# Altium PCB Embarcado.PcbDoc (part 2 of 2)
Units mm, origin at the board's own origin, x right, y up, seen from the top; angles counter-clockwise.
Board outline 64.52 x 71.25 mm, 2 copper layers (Top Layer, Bottom Layer); 37 components, 40 nets, 204 pads, 24 vias.
Unrouted connection lines stored in the file: 4.
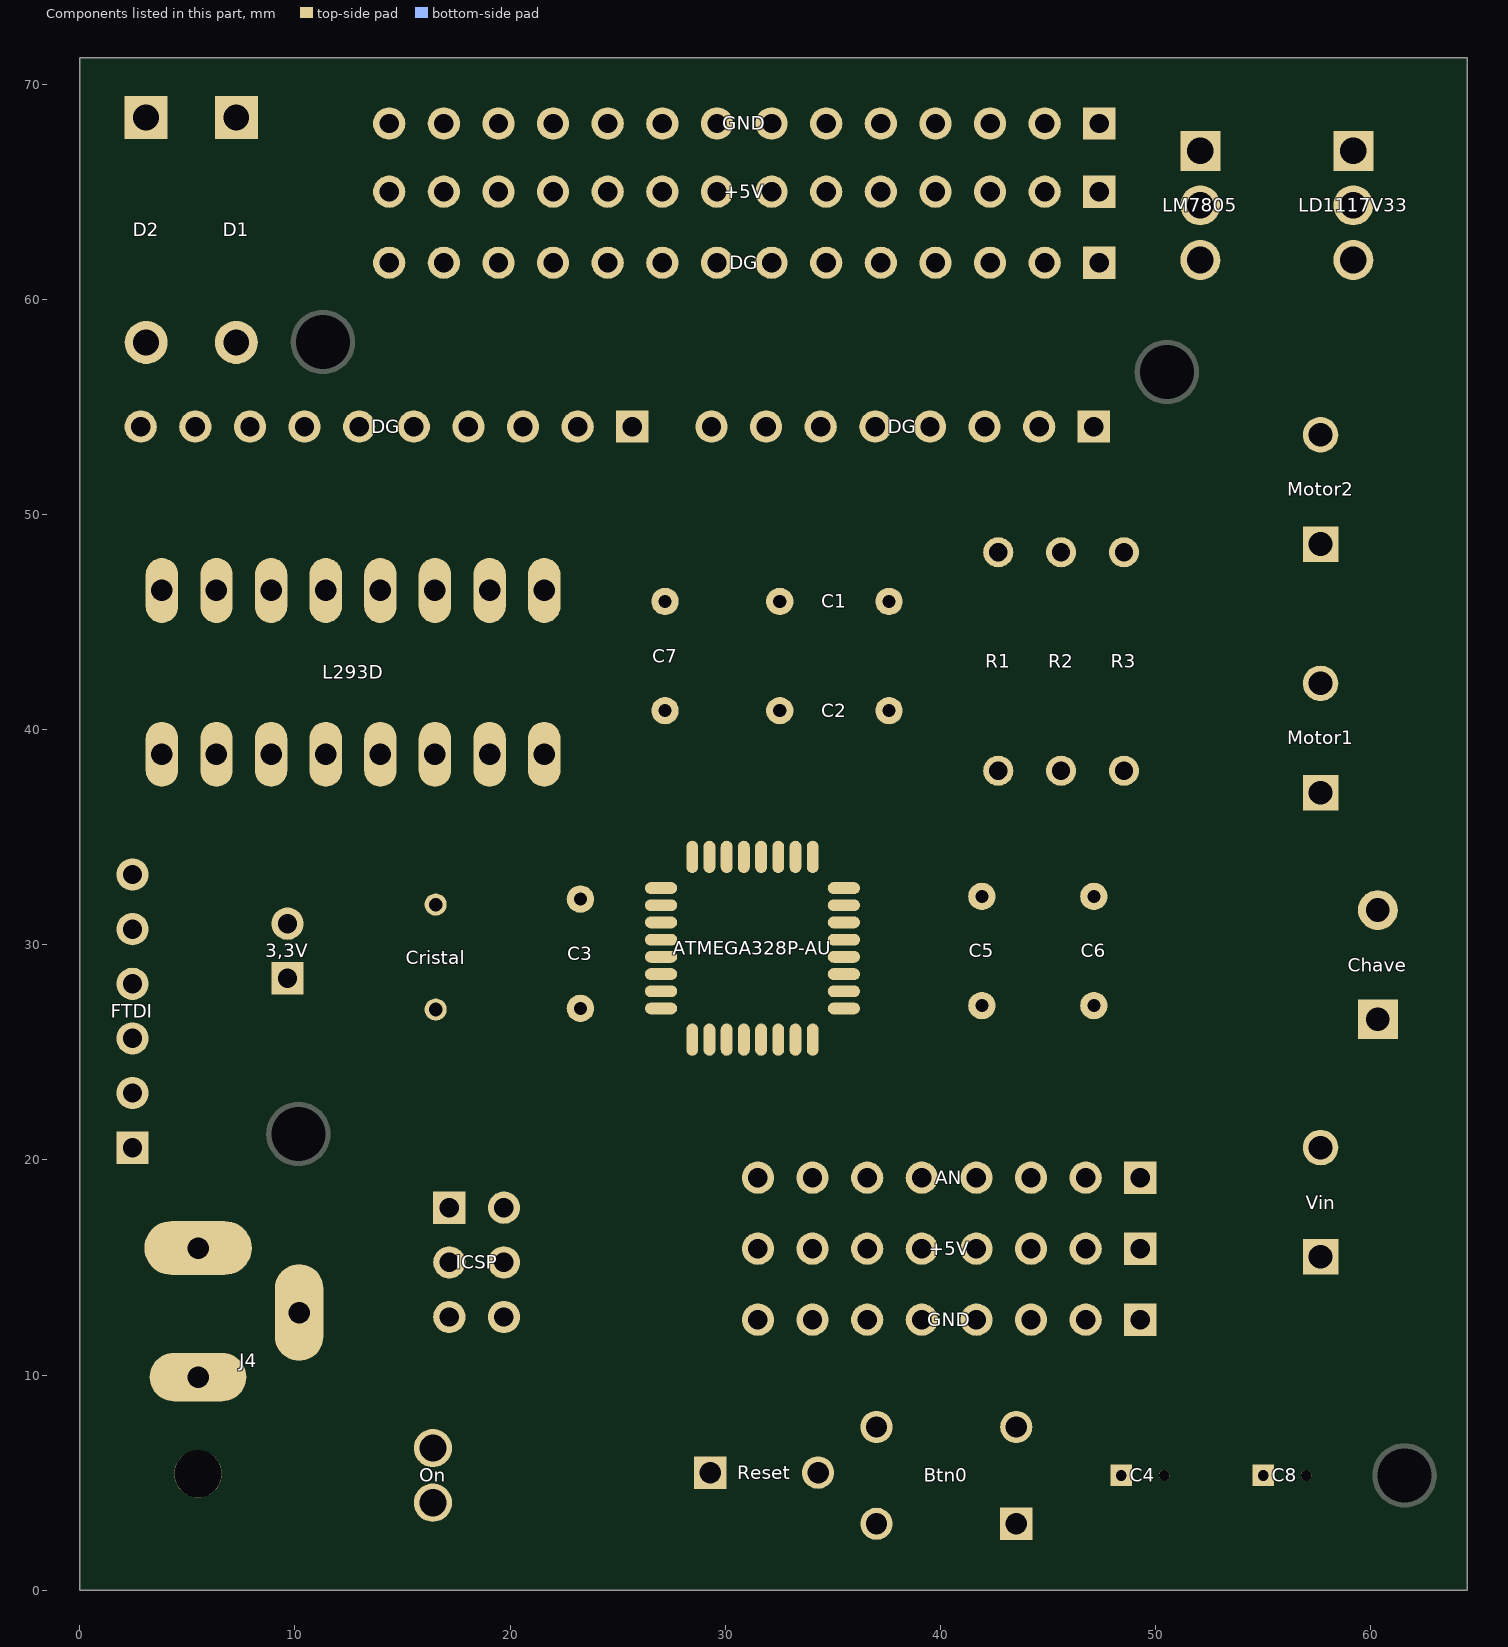
[diagram p2: the components of this part, seen from the top]

## Via types
v1: diameter 1.27, hole 0.711, Top Layer to Bottom Layer, 24 vias

## Nets (pads, with @x,y where several pads share a name; then routed paths per layer and width w, separated by ;. In a path a pad name is that pad's centre, name@x,y a point inside that pad or via, vN(x,y) a via of type N, cw(c..) or ccw(c..) an arc to the next point about the centre after c; other vN are vias at no path point) (continued)
copper on no net: | length 736.4
  Top Layer w0.025: 49.943,26.111 50.248,26.111 ; 49.943,26.137 50.273,26.137 ; 49.943,26.162 50.248,26.162 ; 49.943,26.187 50.248,26.187 ; 49.943,26.213 50.248,26.213 ; 49.943,26.238 50.248,26.238 ; 49.943,26.264 50.248,26.264 ; 49.943,26.289 50.248,26.289 ; 49.943,26.314 50.248,26.314 ; 49.943,26.34 50.248,26.34 ; 49.943,26.365 50.248,26.365 ; 49.943,26.391 50.248,26.391 ; 49.943,26.416 50.248,26.416 ; 49.943,26.441 50.248,26.441 ; 49.943,26.467 50.248,26.467 ; 49.943,26.492 50.248,26.492 ; 49.943,26.518 50.248,26.518 ; 49.943,26.543 50.248,26.543 ; 49.943,26.568 50.248,26.568 ; 49.943,26.594 50.451,26.594 ; 49.943,26.619 50.527,26.619 ; 49.943,26.645 50.553,26.645 ; 49.943,26.67 50.578,26.67 ; 49.943,26.695 50.603,26.695 ; 49.943,26.721 50.603,26.721 ; 49.943,26.746 50.603,26.746 ; 49.943,26.772 50.603,26.772 ; 49.943,26.797 50.273,26.797 ; 49.943,26.822 50.248,26.822 ; 49.943,26.848 50.248,26.848 ; 49.943,26.873 50.248,26.873 ; 49.943,26.899 50.248,26.899 ; 49.943,26.924 50.248,26.924 ; 49.943,26.949 50.248,26.949 ; 49.943,26.975 50.248,26.975 ; 49.943,27 50.248,27 ; 49.943,27.026 50.248,27.026 ; 49.943,27.051 50.248,27.051 ; 49.943,27.076 50.248,27.076 ; 49.943,27.102 50.603,27.102 ; 49.943,27.127 50.603,27.127 ; 49.943,27.153 50.603,27.153 ; 49.943,27.178 50.578,27.178 ; 49.943,27.203 50.578,27.203 ; 49.943,27.229 50.553,27.229 ; 49.943,27.254 50.527,27.254 ; 49.943,27.28 50.476,27.28 ; 50.299,26.797 50.629,26.797 ; 50.324,27.076 50.603,27.076 ; 50.349,26.822 50.629,26.822 ; 50.349,26.848 50.629,26.848 ; 50.349,26.873 50.629,26.873 ; 50.349,26.899 50.629,26.899 ; 50.349,26.924 50.629,26.924 ; 50.349,26.949 50.629,26.949 ; 50.349,26.975 50.629,26.975 ; 50.349,27 50.629,27 ; 50.349,27.026 50.629,27.026 ; 50.349,27.051 50.629,27.051 ; 50.781,26.111 51.086,26.111 ; 50.781,26.137 51.086,26.137 ; 50.781,26.162 51.086,26.162 ; 50.781,26.187 51.086,26.187 ; 50.781,26.213 51.086,26.213 ; 50.781,26.238 51.086,26.238 ; 50.781,26.264 51.086,26.264 ; 50.781,26.289 51.086,26.289 ; 50.781,26.314 51.086,26.314 ; 50.781,26.34 51.086,26.34 ; 50.781,26.365 51.086,26.365 ; 50.781,26.391 51.086,26.391 ; 50.781,26.416 51.086,26.416 ; 50.781,26.441 51.086,26.441 ; 50.781,26.467 51.086,26.467 ; 50.781,26.492 51.086,26.492 ; 50.781,26.518 51.086,26.518 ; 50.781,26.543 51.086,26.543 ; 50.781,26.568 51.086,26.568 ; 50.781,26.594 51.086,26.594 ; 50.781,26.619 51.086,26.619 ; 50.781,26.645 51.086,26.645 ; 50.781,26.67 51.086,26.67 ; 50.781,26.695 51.086,26.695 ; 50.781,26.721 51.086,26.721 ; 50.781,26.746 51.086,26.746 ; 50.781,26.772 51.086,26.772 ; 50.781,26.797 51.086,26.797 ; 50.781,26.822 51.086,26.822 ; 50.781,26.848 51.086,26.848 ; 50.781,26.873 51.086,26.873 ; 50.781,26.899 51.086,26.899 ; 50.781,26.924 51.086,26.924 ; 50.781,26.949 51.086,26.949 ; 50.781,26.975 51.086,26.975 ; 50.781,27 51.086,27 ; 50.781,27.026 51.086,27.026 ; 50.781,27.051 51.086,27.051 ; 50.781,27.076 51.086,27.076 ; 50.781,27.102 51.086,27.102 ; 50.781,27.127 51.086,27.127 ; 50.781,27.153 51.086,27.153 ; 50.781,27.178 51.086,27.178 ; 50.781,27.203 51.086,27.203 ; 50.781,27.229 51.086,27.229 ; 50.781,27.254 51.086,27.254 ; 50.781,27.28 51.086,27.28 ; 50.959,25.095 51.086,25.095 ; 50.959,25.121 51.086,25.121 ; 50.959,25.146 51.086,25.146 ; 50.959,25.171 51.086,25.171 ; 50.959,25.197 51.086,25.197 ; 50.959,25.222 51.086,25.222 ; 50.959,25.248 51.086,25.248 ; 50.959,25.273 51.086,25.273 ; 50.959,25.298 51.086,25.298 ; 50.959,25.324 51.34,25.324 ; 50.959,25.349 51.34,25.349 ; 50.959,25.375 51.34,25.375 ; 50.959,25.4 51.34,25.4 ; 50.959,25.425 51.086,25.425 ; 50.959,25.451 51.086,25.451 ; 50.959,25.476 51.086,25.476 ; 50.959,25.502 51.086,25.502 ; 50.959,25.527 51.086,25.527 ; 50.959,25.552 51.365,25.552 ; 50.959,25.578 51.365,25.578 ; 50.959,25.603 51.365,25.603 ; 50.959,25.629 51.365,25.629 ; 50.959,25.654 51.365,25.654 ; 50.959,31.547 55.633,31.547 ; 50.959,31.572 53.296,31.572 ; 50.984,25.07 51.086,25.07 ; 50.984,31.521 53.27,31.521 ; 50.984,31.598 53.27,31.598 ; 51.01,31.496 53.245,31.496 ; 51.01,31.623 53.245,31.623 ; 51.035,31.471 53.22,31.471 ; 51.061,31.445 53.194,31.445 ; 51.061,31.648 53.22,31.648 ; 51.086,31.42 53.169,31.42 ; 51.086,31.674 53.169,31.674 ; 51.111,31.394 53.143,31.394 ; 51.111,31.699 53.143,31.699 ; 51.137,31.344 53.118,31.344 ; 51.137,31.369 53.118,31.369 ; 51.137,31.725 53.118,31.725 ; 51.162,31.318 53.093,31.318 ; 51.162,31.75 53.093,31.75 ; 51.188,31.293 53.067,31.293 ; 51.188,31.775 53.067,31.775 ; 51.213,31.267 53.042,31.267 ; 51.213,31.801 53.042,31.801 ; 51.238,27.076 51.924,27.076 ; 51.238,27.102 51.924,27.102 ; 51.238,27.127 51.924,27.127 ; 51.238,27.153 51.924,27.153 ; 51.238,27.178 51.924,27.178 ; 51.238,27.203 51.924,27.203 ; 51.238,27.229 51.924,27.229 ; 51.238,27.254 51.924,27.254 ; 51.238,27.28 51.924,27.28 ; 51.238,31.242 53.016,31.242 ; 51.238,31.826 53.016,31.826 ; 51.264,31.217 52.991,31.217 ; 51.264,31.852 52.991,31.852 ; 51.289,31.191 52.966,31.191 ; 51.289,31.877 52.966,31.877 ; 51.315,31.166 52.94,31.166 ; 51.315,31.902 52.94,31.902 ; 51.34,31.14 52.915,31.14 ; 51.34,31.928 52.915,31.928 ; 51.365,31.115 52.889,31.115 ; 51.365,31.953 52.889,31.953 ; 51.391,25.07 51.492,25.07 ; 51.391,25.095 51.518,25.095 ; 51.391,25.121 51.518,25.121 ; 51.391,25.146 51.543,25.146 ; 51.391,31.09 52.864,31.09 ; 51.391,31.979 52.864,31.979 ; 51.416,25.171 51.543,25.171 ; 51.416,25.197 51.569,25.197 ; 51.416,26.111 51.721,26.111 ; 51.416,26.137 51.721,26.137 ; 51.416,26.162 51.721,26.162 ; 51.416,26.187 51.721,26.187 ; 51.416,26.213 51.721,26.213 ; 51.416,26.238 51.721,26.238 ; 51.416,26.264 51.721,26.264 ; 51.416,26.289 51.721,26.289 ; 51.416,26.314 51.721,26.314 ; 51.416,26.34 51.721,26.34 ; 51.416,26.365 51.721,26.365 ; 51.416,26.391 51.721,26.391 ; 51.416,26.416 51.721,26.416 ; 51.416,26.441 51.721,26.441 ; 51.416,26.467 51.721,26.467 ; 51.416,26.492 51.721,26.492 ; 51.416,26.518 51.721,26.518 ; 51.416,26.543 51.721,26.543 ; 51.416,26.568 51.721,26.568 ; 51.416,26.594 51.721,26.594 ; 51.416,26.619 51.721,26.619 ; 51.416,26.645 51.721,26.645 ; 51.416,26.67 51.721,26.67 ; 51.416,26.695 51.721,26.695 ; 51.416,26.721 51.721,26.721 ; 51.416,26.746 51.721,26.746 ; 51.416,26.772 51.721,26.772 ; 51.416,26.797 51.721,26.797 ; 51.416,26.822 51.721,26.822 ; 51.416,26.848 51.721,26.848 ; 51.416,26.873 51.721,26.873 ; 51.416,26.899 51.721,26.899 ; 51.416,26.924 51.721,26.924 ; 51.416,26.949 51.721,26.949 ; 51.416,26.975 51.721,26.975 ; 51.416,27 51.721,27 ; 51.416,27.026 51.721,27.026 ; 51.416,27.051 51.746,27.051 ; 51.416,31.064 52.839,31.064 ; 51.416,32.004 52.839,32.004 ; 51.442,25.222 51.899,25.222 ; 51.442,25.248 51.899,25.248 ; 51.442,25.273 51.899,25.273 ; 51.442,31.013 52.788,31.013 ; 51.442,31.039 52.813,31.039 ; 51.442,32.029 52.813,32.029 ; 51.467,25.298 51.873,25.298 ; 51.467,25.324 51.594,25.324 ; 51.467,30.988 52.762,30.988 ; 51.467,32.055 52.788,32.055 ; 51.492,25.349 51.619,25.349 ; 51.492,25.375 51.619,25.375 ; 51.492,25.4 51.619,25.4 ; 51.492,30.963 52.762,30.963 ; 51.492,32.08 52.762,32.08 ; 51.518,25.425 51.645,25.425 ; 51.518,25.451 51.645,25.451 ; 51.518,25.476 51.645,25.476 ; 51.518,30.937 52.737,30.937 ; 51.518,32.106 52.737,32.106 ; 51.543,25.502 51.797,25.502 ; 51.543,25.527 51.797,25.527 ; 51.543,30.912 52.712,30.912 ; 51.543,32.131 52.712,32.131 ; 51.569,25.552 51.772,25.552 ; 51.569,25.578 51.772,25.578 ; 51.569,25.603 51.746,25.603 ; 51.569,30.886 52.686,30.886 ; 51.569,32.156 52.661,32.156 ; 51.594,25.629 51.746,25.629 ; 51.594,25.654 51.721,25.654 ; 51.594,30.861 52.661,30.861 ; 51.594,32.182 52.635,32.182 ; 51.619,30.836 52.635,30.836 ; 51.619,32.207 52.61,32.207 ; 51.645,30.81 52.61,30.81 ; 51.645,32.233 52.585,32.233 ; 51.67,25.476 51.797,25.476 ; 51.67,30.785 52.585,30.785 ; 51.696,25.4 51.848,25.4 ; 51.696,25.425 51.823,25.425 ; 51.696,25.451 51.823,25.451 ; 51.696,30.759 52.559,30.759 ; 51.696,32.258 52.559,32.258 ; 51.721,25.349 51.848,25.349 ; 51.721,25.375 51.848,25.375 ; 51.721,30.734 52.534,30.734 ; 51.721,32.283 52.534,32.283 ; 51.746,25.324 51.873,25.324 ; 51.746,30.683 52.483,30.683 ; 51.746,30.709 52.508,30.709 ; 51.746,32.309 52.508,32.309 ; 51.772,25.197 51.924,25.197 ; 51.772,30.658 52.458,30.658 ; 51.772,32.334 52.483,32.334 ; 51.797,25.146 51.95,25.146 ; 51.797,25.171 51.924,25.171 ; 51.797,30.632 52.432,30.632 ; 51.797,32.36 52.458,32.36 ; 51.823,25.095 51.95,25.095 ; 51.823,25.121 51.95,25.121 ; 51.823,30.607 52.407,30.607 ; 51.823,32.385 52.432,32.385 ; 51.848,25.07 51.95,25.07 ; 51.848,30.582 52.407,30.582 ; 51.848,32.41 52.407,32.41 ; 51.873,30.556 52.381,30.556 ; 51.873,32.436 52.381,32.436 ; 51.899,30.531 52.356,30.531 ; 51.899,32.461 52.356,32.461 ; 51.924,26.111 52.254,26.111 ; 51.924,26.137 52.254,26.137 ; 51.924,26.162 52.254,26.162 ; 51.924,26.187 52.254,26.187 ; 51.924,26.213 52.254,26.213 ; 51.924,30.505 52.331,30.505 ; 51.924,32.487 52.331,32.487 ; 51.95,26.238 52.254,26.238 ; 51.95,26.264 52.254,26.264 ; 51.95,26.289 52.254,26.289 ; 51.95,26.314 52.28,26.314 ; 51.95,26.34 52.686,26.34 ; 51.95,26.365 52.686,26.365 ; 51.95,26.391 52.661,26.391 ; 51.95,26.416 52.661,26.416 ; 51.95,30.48 52.305,30.48 ; 51.95,32.512 52.305,32.512 ; 51.975,26.441 52.661,26.441 ; 51.975,26.467 52.661,26.467 ; 51.975,26.492 52.661,26.492 ; 51.975,26.518 52.661,26.518 ; 51.975,26.543 52.28,26.543 ; 51.975,26.568 52.28,26.568 ; 51.975,26.594 52.28,26.594 ; 51.975,30.455 52.28,30.455 ; 51.975,32.537 52.28,32.537 ; 52,26.619 52.28,26.619 ; 52,26.645 52.28,26.645 ; 52,26.67 52.28,26.67 ; 52,26.695 52.28,26.695 ; 52,26.721 52.28,26.721 ; 52,26.746 52.28,26.746 ; 52,26.772 52.28,26.772 ; 52,26.797 52.305,26.797 ; 52,30.429 52.254,30.429 ; 52,32.563 52.254,32.563 ; 52.026,25.248 52.153,25.248 ; 52.026,25.273 52.153,25.273 ; 52.026,25.298 52.153,25.298 ; 52.026,25.324 52.153,25.324 ; 52.026,25.349 52.153,25.349 ; 52.026,25.375 52.153,25.375 ; 52.026,25.4 52.153,25.4 ; 52.026,25.425 52.153,25.425 ; 52.026,25.451 52.153,25.451 ; 52.026,25.476 52.153,25.476 ; 52.026,26.822 52.305,26.822 ; 52.026,26.848 52.305,26.848 ; 52.026,26.873 52.305,26.873 ; 52.026,26.899 52.305,26.899 ; 52.026,26.924 52.305,26.924 ; 52.026,26.949 52.585,26.949 ; 52.026,26.975 52.585,26.975 ; 52.026,30.404 52.229,30.404 ; 52.026,32.588 52.229,32.588 ; 52.051,25.197 52.204,25.197 ; 52.051,25.222 52.178,25.222 ; 52.051,25.502 52.178,25.502 ; 52.051,25.527 52.204,25.527 ; 52.051,27 52.585,27 ; 52.051,27.026 52.585,27.026 ; 52.051,27.051 52.585,27.051 ; 52.051,27.076 52.559,27.076 ; 52.051,27.102 52.559,27.102 ; 52.051,27.127 52.559,27.127 ; 52.051,27.153 52.559,27.153 ; 52.051,27.178 52.559,27.178 ; 52.051,30.353 52.178,30.353 ; 52.051,30.378 52.204,30.378 ; 52.051,32.614 52.178,32.614 ; 52.077,25.146 52.483,25.146 ; 52.077,25.171 52.254,25.171 ; 52.077,25.552 52.254,25.552 ; 52.077,25.578 52.483,25.578 ; 52.077,27.203 52.559,27.203 ; 52.077,27.229 52.559,27.229 ; 52.077,27.254 52.534,27.254 ; 52.077,27.28 52.534,27.28 ; 52.077,30.328 52.153,30.328 ; 52.077,32.639 52.153,32.639 ; 52.102,25.121 52.458,25.121 ; 52.102,25.603 52.483,25.603 ; 52.102,30.302 52.153,30.302 ; 52.102,32.664 52.127,32.664 ; 52.127,27.788 54.464,27.788 ; 52.127,27.813 54.464,27.813 ; 52.127,27.838 54.464,27.838 ; 52.127,27.864 54.464,27.864 ; 52.127,27.889 54.464,27.889 ; 52.127,27.915 54.464,27.915 ; 52.127,27.94 54.464,27.94 ; 52.127,27.965 54.464,27.965 ; 52.127,27.991 54.464,27.991 ; 52.127,28.016 54.464,28.016 ; 52.127,28.042 54.464,28.042 ; 52.127,28.067 54.464,28.067 ; 52.127,28.092 54.464,28.092 ; 52.127,28.118 54.464,28.118 ; 52.127,28.143 54.464,28.143 ; 52.127,28.169 54.464,28.169 ; 52.127,28.194 54.464,28.194 ; 52.127,28.219 54.464,28.219 ; 52.127,28.245 54.464,28.245 ; 52.127,28.27 54.464,28.27 ; 52.127,28.296 54.464,28.296 ; 52.127,28.321 54.464,28.321 ; 52.127,28.346 54.464,28.346 ; 52.127,28.372 54.464,28.372 ; 52.127,28.397 54.464,28.397 ; 52.127,28.423 54.464,28.423 ; 52.127,28.448 54.464,28.448 ; 52.127,28.473 54.464,28.473 ; 52.127,28.499 54.464,28.499 ; 52.127,28.524 54.464,28.524 ; 52.127,28.55 54.464,28.55 ; 52.127,28.575 54.464,28.575 ; 52.127,28.6 54.464,28.6 ; 52.127,28.626 54.464,28.626 ; 52.127,28.651 54.464,28.651 ; 52.127,28.677 54.464,28.677 ; 52.127,28.702 54.464,28.702 ; 52.127,28.727 54.464,28.727 ; 52.127,28.753 54.464,28.753 ; 52.127,28.778 54.464,28.778 ; 52.127,28.804 54.464,28.804 ; 52.127,28.829 54.464,28.829 ; 52.127,28.854 54.464,28.854 ; 52.127,28.88 54.464,28.88 ; 52.127,28.905 54.464,28.905 ; 52.127,28.931 54.464,28.931 ; 52.127,28.956 54.464,28.956 ; 52.127,28.981 54.464,28.981 ; 52.127,29.007 54.464,29.007 ; 52.127,29.032 54.464,29.032 ; 52.127,29.058 54.464,29.058 ; 52.127,29.083 54.464,29.083 ; 52.127,29.108 54.464,29.108 ; 52.127,29.134 54.464,29.134 ; 52.127,29.159 54.464,29.159 ; 52.127,29.185 54.464,29.185 ; 52.127,29.21 54.464,29.21 ; 52.127,29.235 54.464,29.235 ; 52.127,29.261 54.464,29.261 ; 52.127,29.286 54.464,29.286 ; 52.127,29.312 54.464,29.312 ; 52.127,29.337 54.464,29.337 ; 52.127,29.362 54.464,29.362 ; 52.127,29.388 54.464,29.388 ; 52.127,29.413 54.464,29.413 ; 52.127,29.439 54.464,29.439 ; 52.127,29.464 54.464,29.464 ; 52.127,29.489 54.464,29.489 ; 52.127,29.515 54.464,29.515 ; 52.127,29.54 54.464,29.54 ; 52.127,29.566 54.464,29.566 ; 52.127,29.591 54.464,29.591 ; 52.127,29.616 54.464,29.616 ; 52.127,29.642 54.464,29.642 ; 52.127,29.667 54.464,29.667 ; 52.127,29.693 54.464,29.693 ; 52.127,29.718 54.464,29.718 ; 52.127,29.743 54.464,29.743 ; 52.127,29.769 54.464,29.769 ; 52.127,29.794 54.464,29.794 ; 52.127,29.82 54.464,29.82 ; 52.127,29.845 54.464,29.845 ; 52.127,29.87 54.464,29.87 ; 52.127,29.896 54.464,29.896 ; 52.127,29.921 54.464,29.921 ; 52.127,29.947 54.464,29.947 ; 52.127,29.972 54.464,29.972 ; 52.127,29.997 54.464,29.997 ; 52.127,30.023 54.464,30.023 ; 52.127,30.048 54.464,30.048 ; 52.127,30.074 54.464,30.074 ; 52.127,30.099 54.464,30.099 ; 52.127,30.124 54.464,30.124 ; 52.127,30.15 54.464,30.15 ; 52.127,30.175 54.464,30.175 ; 52.127,30.201 54.464,30.201 ; 52.127,30.226 54.464,30.226 ; 52.127,30.251 54.464,30.251 ; 52.127,30.277 54.464,30.277 ; 52.153,25.095 52.432,25.095 ; 52.153,25.629 52.432,25.629 ; 52.178,27.356 52.356,27.356 ; 52.204,25.07 52.381,25.07 ; 52.204,25.654 52.381,25.654 ; 52.204,27.381 52.381,27.381 ; 52.229,27.407 52.407,27.407 ; 52.229,27.432 52.458,27.432 ; 52.254,27.457 52.483,27.457 ; 52.28,27.483 52.508,27.483 ; 52.28,27.508 52.534,27.508 ; 52.305,27.534 52.559,27.534 ; 52.331,25.171 52.508,25.171 ; 52.331,25.552 52.508,25.552 ; 52.331,26.721 52.61,26.721 ; 52.331,26.746 52.61,26.746 ; 52.331,26.772 52.61,26.772 ; 52.331,26.797 52.61,26.797 ; 52.331,26.822 52.61,26.822 ; 52.331,26.848 52.61,26.848 ; 52.331,26.873 52.61,26.873 ; 52.331,26.899 52.585,26.899 ; 52.331,26.924 52.585,26.924 ; 52.356,25.197 52.508,25.197 ; 52.356,26.314 52.686,26.314 ; 52.356,26.543 52.661,26.543 ; 52.356,26.568 52.635,26.568 ; 52.356,26.594 52.635,26.594 ; 52.356,26.619 52.635,26.619 ; 52.356,26.645 52.635,26.645 ; 52.356,26.67 52.635,26.67 ; 52.356,26.695 52.635,26.695 ; 52.381,25.222 52.534,25.222 ; 52.381,25.502 52.534,25.502 ; 52.381,25.527 52.534,25.527 ; 52.381,26.111 52.712,26.111 ; 52.381,26.137 52.712,26.137 ; 52.381,26.162 52.712,26.162 ; 52.381,26.187 52.712,26.187 ; 52.381,26.213 52.686,26.213 ; 52.381,26.238 52.686,26.238 ; 52.381,26.264 52.686,26.264 ; 52.381,26.289 52.686,26.289 ; 52.407,25.248 52.534,25.248 ; 52.407,25.273 52.458,25.273 ; 52.407,25.476 52.483,25.476 ; 52.635,25.248 52.762,25.248 ; 52.635,25.273 52.762,25.273 ; 52.635,25.298 52.762,25.298 ; 52.635,25.324 52.762,25.324 ; 52.635,25.349 52.762,25.349 ; 52.635,25.375 52.762,25.375 ; 52.635,25.4 52.762,25.4 ; 52.635,25.425 52.762,25.425 ; 52.635,25.451 52.762,25.451 ; 52.635,25.476 52.762,25.476 ; 52.635,25.502 52.762,25.502 ; 52.635,25.527 52.762,25.527 ; 52.635,25.552 52.762,25.552 ; 52.635,25.578 52.762,25.578 ; 52.635,25.603 52.762,25.603 ; 52.635,25.629 52.762,25.629 ; 52.661,25.171 52.839,25.171 ; 52.661,25.197 52.788,25.197 ; 52.661,25.222 52.788,25.222 ; 52.661,25.654 52.762,25.654 ; 52.686,25.121 53.067,25.121 ; 52.686,25.146 53.093,25.146 ; 52.712,25.095 53.042,25.095 ; 52.788,25.07 52.991,25.07 ; 52.813,26.416 53.143,26.416 ; 52.813,26.441 53.143,26.441 ; 52.813,26.467 53.143,26.467 ; 52.813,26.492 53.143,26.492 ; 52.813,26.518 53.143,26.518 ; 52.813,26.543 53.143,26.543 ; 52.813,26.568 53.143,26.568 ; 52.813,26.594 53.143,26.594 ; 52.813,26.619 53.143,26.619 ; 52.813,26.645 53.143,26.645 ; 52.813,26.67 53.143,26.67 ; 52.813,26.695 53.143,26.695 ; 52.813,26.721 53.143,26.721 ; 52.813,26.746 53.143,26.746 ; 52.813,26.772 53.143,26.772 ; 52.813,26.797 53.143,26.797 ; 52.813,26.822 53.143,26.822 ; 52.813,26.848 53.143,26.848 ; 52.813,26.873 53.143,26.873 ; 52.813,26.899 53.143,26.899 ; 52.813,26.924 53.143,26.924 ; 52.813,26.949 53.143,26.949 ; 52.813,26.975 53.143,26.975 ; 52.839,26.264 53.55,26.264 ; 52.839,26.289 53.169,26.289 ; 52.839,26.314 53.143,26.314 ; 52.839,26.34 53.143,26.34 ; 52.839,26.365 53.143,26.365 ; 52.839,26.391 53.143,26.391 ; 52.839,27 53.143,27 ; 52.839,27.026 53.143,27.026 ; 52.839,27.051 53.143,27.051 ; 52.839,27.076 53.143,27.076 ; 52.839,27.102 53.143,27.102 ; 52.839,27.127 53.524,27.127 ; 52.864,26.213 53.55,26.213 ; 52.864,26.238 53.55,26.238 ; 52.864,27.153 53.524,27.153 ; 52.864,27.178 53.499,27.178 ; 52.889,26.187 53.55,26.187 ; 52.889,27.203 53.499,27.203 ; 52.915,26.162 53.55,26.162 ; 52.915,27.229 53.474,27.229 ; 52.94,25.171 53.093,25.171 ; 52.94,26.137 53.296,26.137 ; 52.94,27.254 53.423,27.254 ; 52.966,25.197 53.118,25.197 ; 52.966,27.28 53.397,27.28 ; 52.991,25.222 53.118,25.222 ; 52.991,25.248 53.118,25.248 ; 52.991,25.273 53.118,25.273 ; 52.991,25.298 53.118,25.298 ; 52.991,25.324 53.118,25.324 ; 52.991,25.349 53.118,25.349 ; 52.991,25.375 53.118,25.375 ; 52.991,25.4 53.118,25.4 ; 52.991,25.425 53.118,25.425 ; 52.991,25.451 53.118,25.451 ; 52.991,25.476 53.118,25.476 ; 52.991,25.502 53.118,25.502 ; 52.991,25.527 53.118,25.527 ; 52.991,25.552 53.118,25.552 ; 52.991,25.578 53.118,25.578 ; 52.991,25.603 53.118,25.603 ; 52.991,25.629 53.118,25.629 ; 52.991,25.654 53.118,25.654 ; 52.991,26.111 53.27,26.111 ; 53.016,27.305 53.347,27.305 ; 53.042,26.086 53.22,26.086 ; 53.169,26.594 53.55,26.594 ; 53.169,26.619 53.55,26.619 ; 53.169,26.645 53.55,26.645 ; 53.169,26.67 53.55,26.67 ; 53.169,26.695 53.55,26.695 ; 53.169,26.721 53.55,26.721 ; 53.194,26.568 53.55,26.568 ; 53.194,26.746 53.55,26.746 ; 53.22,26.289 53.55,26.289 ; 53.22,27.051 53.55,27.051 ; 53.22,27.076 53.55,27.076 ; 53.22,27.102 53.524,27.102 ; 53.245,25.095 53.677,25.095 ; 53.245,25.121 53.677,25.121 ; 53.245,25.146 53.677,25.146 ; 53.245,25.171 53.651,25.171 ; 53.245,25.197 53.372,25.197 ; 53.245,25.222 53.372,25.222 ; 53.245,25.248 53.372,25.248 ; 53.245,25.273 53.372,25.273 ; 53.245,25.298 53.372,25.298 ; 53.245,25.324 53.372,25.324 ; 53.245,25.349 53.372,25.349 ; 53.245,25.375 53.372,25.375 ; 53.245,25.4 53.372,25.4 ; 53.245,25.425 53.372,25.425 ; 53.245,25.451 53.372,25.451 ; 53.245,25.476 53.372,25.476 ; 53.245,25.502 53.372,25.502 ; 53.245,25.527 53.372,25.527 ; 53.245,25.552 53.372,25.552 ; 53.245,25.578 53.372,25.578 ; 53.245,25.603 53.372,25.603 ; 53.245,25.629 53.372,25.629 ; 53.245,26.314 53.55,26.314 ; 53.245,26.34 53.55,26.34 ; 53.245,26.365 53.55,26.365 ; 53.245,26.391 53.55,26.391 ; 53.245,26.416 53.55,26.416 ; 53.245,26.441 53.55,26.441 ; 53.245,26.467 53.55,26.467 ; 53.245,26.492 53.55,26.492 ; 53.245,26.518 53.55,26.518 ; 53.245,26.543 53.55,26.543 ; 53.245,26.873 53.55,26.873 ; 53.245,26.899 53.55,26.899 ; 53.245,26.924 53.55,26.924 ; 53.245,26.949 53.55,26.949 ; 53.245,26.975 53.55,26.975 ; 53.245,27 53.55,27 ; 53.245,27.026 53.55,27.026 ; 53.27,25.07 53.651,25.07 ; 53.27,25.654 53.372,25.654 ; 53.321,31.521 55.607,31.521 ; 53.321,31.572 55.633,31.572 ; 53.347,26.111 53.55,26.111 ; 53.347,26.137 53.55,26.137 ; 53.347,31.496 55.582,31.496 ; 53.347,31.598 55.607,31.598 ; 53.372,31.471 55.556,31.471 ; 53.372,31.623 55.582,31.623 ; 53.397,31.445 55.556,31.445 ; 53.397,31.648 55.556,31.648 ; 53.423,31.42 55.531,31.42 ; 53.423,31.674 55.531,31.674 ; 53.448,31.394 55.506,31.394 ; 53.448,31.699 55.506,31.699 ; 53.474,31.369 55.48,31.369 ; 53.474,31.725 55.48,31.725 ; 53.499,31.344 55.455,31.344 ; 53.499,31.75 55.455,31.75 ; 53.524,31.318 55.429,31.318 ; 53.524,31.775 55.429,31.775 ; 53.55,31.267 55.379,31.267 ; 53.55,31.293 55.404,31.293 ; 53.55,31.801 55.379,31.801 ; 53.575,31.242 55.353,31.242 ; 53.575,31.826 55.353,31.826 ; 53.601,31.217 55.328,31.217 ; 53.601,31.852 55.328,31.852 ; 53.626,31.191 55.302,31.191 ; 53.626,31.877 55.302,31.877 ; 53.651,31.166 55.277,31.166 ; 53.651,31.902 55.277,31.902 ; 53.677,31.14 55.252,31.14 ; 53.677,31.928 55.252,31.928 ; 53.702,31.115 55.226,31.115 ; 53.702,31.953 55.226,31.953 ; 53.728,26.34 54.058,26.34 ; 53.728,26.365 54.058,26.365 ; 53.728,26.391 54.058,26.391 ; 53.728,26.416 54.058,26.416 ; 53.728,26.441 54.058,26.441 ; 53.728,26.467 54.058,26.467 ; 53.728,26.492 54.058,26.492 ; 53.728,26.518 54.058,26.518 ; 53.728,26.543 54.058,26.543 ; 53.728,26.568 54.058,26.568 ; 53.728,26.594 54.058,26.594 ; 53.728,26.619 54.058,26.619 ; 53.728,26.645 54.058,26.645 ; 53.728,26.67 54.058,26.67 ; 53.728,26.695 54.058,26.695 ; 53.728,26.721 54.058,26.721 ; 53.728,26.746 54.058,26.746 ; 53.728,26.772 54.058,26.772 ; 53.728,26.797 54.058,26.797 ; 53.728,26.822 54.058,26.822 ; 53.728,26.848 54.058,26.848 ; 53.728,26.873 54.058,26.873 ; 53.728,26.899 54.058,26.899 ; 53.728,26.924 54.058,26.924 ; 53.728,26.949 54.058,26.949 ; 53.728,26.975 54.058,26.975 ; 53.728,27 54.058,27 ; 53.728,27.026 54.058,27.026 ; 53.728,27.051 54.058,27.051 ; 53.728,31.09 55.201,31.09 ; 53.728,31.979 55.201,31.979 ; 53.753,25.095 54.134,25.095 ; 53.753,25.121 54.185,25.121 ; 53.753,25.146 54.21,25.146 ; 53.753,25.171 54.21,25.171 ; 53.753,25.197 53.88,25.197 ; 53.753,25.222 53.88,25.222 ; 53.753,25.248 53.88,25.248 ; 53.753,25.273 53.88,25.273 ; 53.753,25.298 53.88,25.298 ; 53.753,25.324 53.88,25.324 ; 53.753,25.349 53.88,25.349 ; 53.753,25.375 53.88,25.375 ; 53.753,25.4 53.88,25.4 ; 53.753,25.425 53.88,25.425 ; 53.753,25.451 53.88,25.451 ; 53.753,25.476 53.88,25.476 ; 53.753,25.502 53.88,25.502 ; 53.753,25.527 53.88,25.527 ; 53.753,25.552 54.21,25.552 ; 53.753,25.578 54.21,25.578 ; 53.753,25.603 54.185,25.603 ; 53.753,25.629 54.134,25.629 ; 53.753,26.264 54.439,26.264 ; 53.753,26.289 54.083,26.289 ; 53.753,26.314 54.058,26.314 ; 53.753,27.076 54.058,27.076 ; 53.753,27.102 54.058,27.102 ; 53.753,27.127 54.439,27.127 ; 53.753,27.153 54.413,27.153 ; 53.753,31.064 55.201,31.064 ; 53.753,32.004 55.175,32.004 ; 53.778,25.07 54.058,25.07 ; 53.778,25.654 54.058,25.654 ; 53.778,26.213 54.388,26.213 ; 53.778,26.238 54.413,26.238 ; 53.778,27.178 54.413,27.178 ; 53.778,31.039 55.175,31.039 ; 53.778,32.029 55.15,32.029 ; 53.804,26.187 54.388,26.187 ; 53.804,27.203 54.388,27.203 ; 53.804,31.013 55.15,31.013 ; 53.804,32.055 55.125,32.055 ; 53.829,26.162 54.363,26.162 ; 53.829,27.229 54.363,27.229 ; 53.829,30.988 55.125,30.988 ; 53.829,32.08 55.099,32.08 ; 53.855,26.137 54.312,26.137 ; 53.855,27.254 54.337,27.254 ; 53.855,30.937 55.074,30.937 ; 53.855,30.963 55.099,30.963 ; 53.88,27.28 54.312,27.28 ; 53.88,30.912 55.048,30.912 ; 53.88,32.106 55.074,32.106 ; 53.905,26.111 54.286,26.111 ; 53.905,30.886 55.023,30.886 ; 53.905,32.131 55.048,32.131 ; 53.931,27.305 54.236,27.305 ; 53.931,30.861 54.998,30.861 ; 53.931,32.156 55.023,32.156 ; 53.956,30.836 54.972,30.836 ; 53.956,32.182 54.998,32.182 ; 53.982,26.086 54.21,26.086 ; 53.982,30.81 54.947,30.81 ; 53.982,32.207 54.972,32.207 ; 54.007,30.785 54.921,30.785 ; 54.007,32.233 54.947,32.233 ; 54.032,30.759 54.896,30.759 ; 54.032,32.258 54.921,32.258 ; 54.058,30.734 54.871,30.734 ; 54.058,32.283 54.871,32.283 ; 54.083,25.197 54.236,25.197 ; 54.083,25.527 54.236,25.527 ; 54.083,30.709 54.845,30.709 ; 54.083,32.309 54.845,32.309 ; 54.109,25.222 54.236,25.222 ; 54.109,25.248 54.261,25.248 ; 54.109,25.476 54.261,25.476 ; 54.109,25.502 54.236,25.502 ; 54.109,26.289 54.439,26.289 ; 54.109,30.683 54.845,30.683 ; 54.109,32.334 54.82,32.334 ; 54.134,25.273 54.261,25.273 ; 54.134,25.298 54.261,25.298 ; 54.134,25.324 54.261,25.324 ; 54.134,25.349 54.261,25.349 ; 54.134,25.375 54.261,25.375 ; 54.134,25.4 54.261,25.4 ; 54.134,25.425 54.261,25.425 ; 54.134,25.451 54.261,25.451 ; 54.134,26.314 54.439,26.314 ; 54.134,26.34 54.439,26.34 ; 54.134,26.365 54.439,26.365 ; 54.134,26.391 54.464,26.391 ; 54.134,26.416 54.464,26.416 ; 54.134,26.441 54.464,26.441 ; 54.134,26.467 54.464,26.467 ; 54.134,26.492 54.464,26.492 ; 54.134,26.518 54.464,26.518 ; 54.134,26.543 54.464,26.543 ; 54.134,26.568 54.464,26.568 ; 54.134,26.594 54.464,26.594 ; 54.134,26.619 54.464,26.619 ; 54.134,26.645 54.464,26.645 ; 54.134,26.67 54.464,26.67 ; 54.134,26.695 54.464,26.695 ; 54.134,26.721 54.464,26.721 ; 54.134,26.746 54.464,26.746 ; 54.134,26.772 54.464,26.772 ; 54.134,26.797 54.464,26.797 ; 54.134,26.822 54.464,26.822 ; 54.134,26.848 54.464,26.848 ; 54.134,26.873 54.464,26.873 ; 54.134,26.899 54.464,26.899 ; 54.134,26.924 54.464,26.924 ; 54.134,26.949 54.464,26.949 ; 54.134,26.975 54.464,26.975 ; 54.134,27 54.464,27 ; 54.134,27.026 54.464,27.026 ; 54.134,27.051 54.439,27.051 ; 54.134,27.076 54.439,27.076 ; 54.134,27.102 54.439,27.102 ; 54.134,30.658 54.82,30.658 ; 54.134,32.36 54.794,32.36 ; 54.159,30.607 54.769,30.607 ; 54.159,30.632 54.794,30.632 ; 54.159,32.385 54.769,32.385 ; 54.185,30.582 54.744,30.582 ; 54.185,32.41 54.744,32.41 ; 54.21,30.556 54.718,30.556 ; 54.21,32.436 54.718,32.436 ; 54.236,30.531 54.693,30.531 ; 54.236,32.461 54.693,32.461 ; 54.261,30.505 54.667,30.505 ; 54.261,32.487 54.667,32.487 ; 54.286,30.48 54.642,30.48 ; 54.286,32.512 54.642,32.512 ; 54.312,25.07 54.439,25.07 ; 54.312,25.095 54.464,25.095 ; 54.312,30.455 54.617,30.455 ; 54.312,32.537 54.617,32.537 ; 54.337,25.121 54.464,25.121 ; 54.337,25.146 54.464,25.146 ; 54.337,25.171 54.49,25.171 ; 54.337,30.429 54.591,30.429 ; 54.337,32.563 54.591,32.563 ; 54.363,25.197 54.49,25.197 ; 54.363,25.222 54.845,25.222 ; 54.363,30.404 54.566,30.404 ; 54.363,32.588 54.566,32.588 ; 54.388,25.248 54.845,25.248 ; 54.388,25.273 54.82,25.273 ; 54.388,25.298 54.82,25.298 ; 54.388,30.378 54.54,30.378 ; 54.388,32.614 54.54,32.614 ; 54.413,25.324 54.54,25.324 ; 54.413,25.349 54.54,25.349 ; 54.413,30.353 54.515,30.353 ; 54.413,32.639 54.515,32.639 ; 54.439,25.375 54.566,25.375 ; 54.439,25.4 54.566,25.4 ; 54.439,25.425 54.566,25.425 ; 54.439,30.302 54.49,30.302 ; 54.439,30.328 54.49,30.328 ; 54.439,32.664 54.49,32.664 ; 54.464,25.451 54.591,25.451 ; 54.464,25.476 54.591,25.476 ; 54.49,25.502 54.744,25.502 ; 54.49,25.527 54.718,25.527 ; 54.49,25.552 54.718,25.552 ; 54.515,25.578 54.693,25.578 ; 54.515,25.603 54.693,25.603 ; 54.54,25.629 54.693,25.629 ; 54.54,25.654 54.667,25.654 ; 54.617,25.451 54.744,25.451 ; 54.617,25.476 54.744,25.476 ; 54.642,25.375 54.794,25.375 ; 54.642,25.4 54.769,25.4 ; 54.642,25.425 54.769,25.425 ; 54.642,26.111 54.947,26.111 ; 54.642,26.137 54.947,26.137 ; 54.642,26.162 54.947,26.162 ; 54.642,26.187 54.947,26.187 ; 54.642,26.213 54.947,26.213 ; 54.642,26.238 54.947,26.238 ; 54.642,26.264 54.947,26.264 ; 54.642,26.289 54.947,26.289 ; 54.642,26.314 54.947,26.314 ; 54.642,26.34 54.947,26.34 ; 54.642,26.365 54.947,26.365 ; 54.642,26.391 54.947,26.391 ; 54.642,26.416 54.947,26.416 ; 54.642,26.441 54.947,26.441 ; 54.642,26.467 54.947,26.467 ; 54.642,26.492 54.947,26.492 ; 54.642,26.518 54.947,26.518 ; 54.642,26.543 54.947,26.543 ; 54.642,26.568 54.947,26.568 ; 54.642,26.594 54.947,26.594 ; 54.642,26.619 54.947,26.619 ; 54.642,26.645 55.302,26.645 ; 54.642,26.67 55.302,26.67 ; 54.642,26.695 55.252,26.695 ; 54.642,26.721 55.201,26.721 ; 54.642,26.746 55.252,26.746 ; 54.642,26.772 55.302,26.772 ; 54.642,26.797 55.302,26.797 ; 54.642,26.822 55.328,26.822 ; 54.642,26.848 54.947,26.848 ; 54.642,26.873 54.947,26.873 ; 54.642,26.899 54.947,26.899 ; 54.642,26.924 54.947,26.924 ; 54.642,26.949 54.947,26.949 ; 54.642,26.975 54.947,26.975 ; 54.642,27 54.947,27 ; 54.642,27.026 54.947,27.026 ; 54.642,27.051 54.947,27.051 ; 54.642,27.076 54.947,27.076 ; 54.642,27.102 55.328,27.102 ; 54.642,27.127 55.328,27.127 ; 54.642,27.153 55.302,27.153 ; 54.642,27.178 55.302,27.178 ; 54.642,27.203 55.277,27.203 ; 54.642,27.229 55.252,27.229 ; 54.642,27.254 55.226,27.254 ; 54.642,27.28 55.175,27.28 ; 54.667,25.324 54.794,25.324 ; 54.667,25.349 54.794,25.349 ; 54.718,25.171 54.871,25.171 ; 54.718,25.197 54.845,25.197 ; 54.744,25.121 54.896,25.121 ; 54.744,25.146 54.871,25.146 ; 54.769,25.07 54.896,25.07 ; 54.769,25.095 54.896,25.095 ; 54.972,25.07 55.252,25.07 ; 54.972,25.095 55.353,25.095 ; 54.972,25.121 55.379,25.121 ; 54.972,25.146 55.404,25.146 ; 54.972,25.171 55.429,25.171 ; 54.972,25.197 55.099,25.197 ; 54.972,25.222 55.099,25.222 ; 54.972,25.248 55.099,25.248 ; 54.972,25.273 55.099,25.273 ; 54.972,25.298 55.099,25.298 ; 54.972,25.324 55.099,25.324 ; 54.972,25.349 55.099,25.349 ; 54.972,25.375 55.099,25.375 ; 54.972,25.4 55.099,25.4 ; 54.972,25.425 55.099,25.425 ; 54.972,25.451 55.099,25.451 ; 54.972,25.476 55.099,25.476 ; 54.972,25.502 55.099,25.502 ; 54.972,25.527 55.099,25.527 ; 54.972,25.552 55.429,25.552 ; 54.972,25.578 55.404,25.578 ; 54.972,25.603 55.379,25.603 ; 54.972,25.629 55.353,25.629 ; 54.972,25.654 55.277,25.654 ; 55.023,26.619 55.328,26.619 ; 55.023,26.848 55.328,26.848 ; 55.023,27.076 55.328,27.076 ; 55.048,26.111 55.328,26.111 ; 55.048,26.137 55.353,26.137 ; 55.048,26.162 55.328,26.162 ; 55.048,26.187 55.328,26.187 ; 55.048,26.213 55.328,26.213 ; 55.048,26.238 55.328,26.238 ; 55.048,26.264 55.328,26.264 ; 55.048,26.289 55.328,26.289 ; 55.048,26.314 55.328,26.314 ; 55.048,26.34 55.328,26.34 ; 55.048,26.365 55.328,26.365 ; 55.048,26.391 55.328,26.391 ; 55.048,26.416 55.328,26.416 ; 55.048,26.441 55.328,26.441 ; 55.048,26.467 55.328,26.467 ; 55.048,26.492 55.328,26.492 ; 55.048,26.518 55.328,26.518 ; 55.048,26.543 55.328,26.543 ; 55.048,26.568 55.328,26.568 ; 55.048,26.594 55.328,26.594 ; 55.048,26.873 55.328,26.873 ; 55.048,26.899 55.328,26.899 ; 55.048,26.924 55.328,26.924 ; 55.048,26.949 55.328,26.949 ; 55.048,26.975 55.328,26.975 ; 55.048,27 55.328,27 ; 55.048,27.026 55.328,27.026 ; 55.048,27.051 55.328,27.051 ; 55.302,25.197 55.455,25.197 ; 55.302,25.502 55.455,25.502 ; 55.302,25.527 55.455,25.527 ; 55.328,25.222 55.455,25.222 ; 55.328,25.248 55.455,25.248 ; 55.328,25.273 55.48,25.273 ; 55.328,25.298 55.48,25.298 ; 55.328,25.425 55.48,25.425 ; 55.328,25.451 55.455,25.451 ; 55.328,25.476 55.455,25.476 ; 55.353,25.324 55.48,25.324 ; 55.353,25.349 55.48,25.349 ; 55.353,25.375 55.48,25.375 ; 55.353,25.4 55.48,25.4 ; 55.455,26.111 55.785,26.111 ; 55.455,26.137 55.785,26.137 ; 55.455,26.162 55.785,26.162 ; 55.455,26.187 55.785,26.187 ; 55.48,26.213 55.785,26.213 ; 55.48,26.238 55.785,26.238 ; 55.48,26.264 55.81,26.264 ; 55.48,26.289 55.81,26.289 ; 55.48,26.314 55.81,26.314 ; 55.48,26.34 56.217,26.34 ; 55.48,26.365 56.217,26.365 ; 55.48,26.391 56.217,26.391 ; 55.506,26.416 56.191,26.416 ; 55.506,26.441 56.191,26.441 ; 55.506,26.467 56.191,26.467 ; 55.506,26.492 56.191,26.492 ; 55.506,26.518 56.191,26.518 ; 55.506,26.543 55.81,26.543 ; 55.506,26.568 55.81,26.568 ; 55.531,26.594 55.81,26.594 ; 55.531,26.619 55.81,26.619 ; 55.531,26.645 55.81,26.645 ; 55.531,26.67 55.81,26.67 ; 55.531,26.695 55.81,26.695 ; 55.531,26.721 55.81,26.721 ; 55.531,26.746 55.81,26.746 ; 55.531,26.772 55.836,26.772 ; 55.556,26.797 55.836,26.797 ; 55.556,26.822 55.836,26.822 ; 55.556,26.848 55.836,26.848 ; 55.556,26.873 55.836,26.873 ; 55.556,26.899 55.836,26.899 ; 55.556,26.924 55.836,26.924 ; 55.556,26.949 56.115,26.949 ; 55.582,25.07 56.014,25.07 ; 55.582,25.095 56.039,25.095 ; 55.582,25.121 56.039,25.121 ; 55.582,25.146 56.039,25.146 ; 55.582,25.171 56.014,25.171 ; 55.582,25.197 55.709,25.197 ; 55.582,25.222 55.709,25.222 ; 55.582,25.248 55.709,25.248 ; 55.582,25.273 55.709,25.273 ; 55.582,25.298 55.709,25.298 ; 55.582,25.324 55.988,25.324 ; 55.582,25.349 56.014,25.349 ; 55.582,25.375 56.014,25.375 ; 55.582,25.4 56.014,25.4 ; 55.582,25.425 55.988,25.425 ; 55.582,25.451 55.709,25.451 ; 55.582,25.476 55.709,25.476 ; 55.582,25.502 55.709,25.502 ; 55.582,25.527 55.709,25.527 ; 55.582,25.552 56.014,25.552 ; 55.582,25.578 56.014,25.578 ; 55.582,25.603 56.014,25.603 ; 55.582,25.629 56.014,25.629 ; 55.582,25.654 56.014,25.654 ; 55.582,26.975 56.115,26.975 ; 55.582,27 56.115,27 ; 55.582,27.026 56.115,27.026 ; 55.582,27.051 56.115,27.051 ; 55.582,27.076 56.115,27.076 ; 55.582,27.102 56.09,27.102 ; 55.582,27.127 56.09,27.127 ; 55.582,27.153 56.09,27.153 ; 55.607,27.178 56.09,27.178 ; 55.607,27.203 56.09,27.203 ; 55.607,27.229 56.09,27.229 ; 55.607,27.254 56.09,27.254 ; 55.607,27.28 56.064,27.28 ; 55.861,26.772 56.141,26.772 ; 55.861,26.797 56.141,26.797 ; 55.861,26.822 56.141,26.822 ; 55.861,26.848 56.141,26.848 ; 55.861,26.873 56.141,26.873 ; 55.861,26.899 56.141,26.899 ; 55.861,26.924 56.115,26.924 ; 55.887,26.314 56.217,26.314 ; 55.887,26.543 56.191,26.543 ; 55.887,26.568 56.191,26.568 ; 55.887,26.594 56.166,26.594 ; 55.887,26.619 56.166,26.619 ; 55.887,26.645 56.166,26.645 ; 55.887,26.67 56.166,26.67 ; 55.887,26.695 56.166,26.695 ; 55.887,26.721 56.166,26.721 ; 55.887,26.746 56.141,26.746 ; 55.912,26.111 56.242,26.111 ; 55.912,26.137 56.242,26.137 ; 55.912,26.162 56.242,26.162 ; 55.912,26.187 56.242,26.187 ; 55.912,26.213 56.242,26.213 ; 55.912,26.238 56.217,26.238 ; 55.912,26.264 56.217,26.264 ; 55.912,26.289 56.217,26.289 ; 56.344,26.34 56.649,26.34 ; 56.344,26.365 56.649,26.365 ; 56.344,26.391 56.649,26.391 ; 56.344,26.416 56.649,26.416 ; 56.344,26.441 56.649,26.441 ; 56.344,26.467 56.649,26.467 ; 56.344,26.492 56.649,26.492 ; 56.344,26.518 56.649,26.518 ; 56.344,26.873 56.725,26.873 ; 56.344,26.899 56.699,26.899 ; 56.344,26.924 56.674,26.924 ; 56.344,26.949 56.649,26.949 ; 56.344,26.975 56.649,26.975 ; 56.344,27 56.649,27 ; 56.344,27.026 56.649,27.026 ; 56.344,27.051 56.649,27.051 ; 56.344,27.076 56.649,27.076 ; 56.344,27.102 56.649,27.102 ; 56.344,27.127 57.03,27.127 ; 56.369,26.238 57.03,26.238 ; 56.369,26.264 57.03,26.264 ; 56.369,26.289 56.674,26.289 ; 56.369,26.314 56.649,26.314 ; 56.369,26.797 56.852,26.797 ; 56.369,26.822 56.826,26.822 ; 56.369,26.848 56.776,26.848 ; 56.369,27.153 57.03,27.153 ; 56.369,27.178 57.004,27.178 ; 56.395,26.213 57.03,26.213 ; 56.395,26.772 56.903,26.772 ; 56.395,27.203 57.004,27.203 ; 56.395,27.229 56.979,27.229 ; 56.42,26.187 57.004,26.187 ; 56.42,26.746 56.928,26.746 ; 56.42,27.254 56.953,27.254 ; 56.445,26.162 56.979,26.162 ; 56.445,26.721 56.953,26.721 ; 56.471,26.137 56.953,26.137 ; 56.471,26.695 56.979,26.695 ; 56.471,27.28 56.903,27.28 ; 56.522,26.111 56.903,26.111 ; 56.522,26.67 57.004,26.67 ; 56.522,27.305 56.852,27.305 ; 56.547,26.645 57.004,26.645 ; 56.598,26.086 56.826,26.086 ; 56.598,26.619 57.03,26.619 ; 56.623,26.594 57.03,26.594 ; 56.649,26.568 57.03,26.568 ; 56.699,26.543 57.055,26.543 ; 56.725,26.289 57.055,26.289 ; 56.725,26.518 57.055,26.518 ; 56.725,26.949 57.03,26.949 ; 56.725,26.975 57.03,26.975 ; 56.725,27 57.03,27 ; 56.725,27.026 57.03,27.026 ; 56.725,27.051 57.03,27.051 ; 56.725,27.076 57.03,27.076 ; 56.725,27.102 57.03,27.102 ; 56.75,26.314 57.055,26.314 ; 56.75,26.34 57.055,26.34 ; 56.75,26.365 57.055,26.365 ; 56.75,26.391 57.055,26.391 ; 56.75,26.416 57.055,26.416 ; 56.75,26.441 57.055,26.441 ; 56.75,26.467 57.055,26.467 ; 56.75,26.492 57.055,26.492

## Polygon pours and split planes (outlines as drawn)
no net on Top Layer "Top Layer-No Net" (solid, pour order 2): 64.516,0 0,0 0,71.247 64.516,71.247
no net on Top Layer "Top Layer-No Net 1" (solid, pour order 0): 0,0

## Silkscreen, mask and mechanical layers (free items; w line width, h text height)
Top Overlay:
  text "13" at 13.748,58.801 h1.52
  text "12" at 16.288,58.801 h1.52
  text "~11" at 18.574,58.801 h1.52
  text "~10" at 21.114,58.801 h1.52
  text "~9" at 23.908,58.801 h1.52
  text "8" at 26.702,58.801 h1.52
  text "7" at 29.242,58.801 h1.52
  text "~6" at 31.528,58.801 h1.52
  text "~5" at 34.195,58.801 h1.52
  text "4" at 36.735,58.801 h1.52
  text "~3" at 39.148,58.801 h1.52
  text "2" at 41.942,58.801 h1.52
  text "1" at 44.609,58.801 h1.52
  text "0" at 47.149,58.801 h1.52
  text "PWM (~)" at 28.607,56.896 h1.52
  text "1" at 45.117,51.689 h1.52 r90
  text "8" at 26.194,51.562 h1.52 r88.09
  text "7" at 29.877,51.562 h1.52 r90
  text "4" at 37.497,51.562 h1.52 r90
  text "2" at 42.577,51.562 h1.52 r90
  text "0" at 47.784,51.562 h1.52 r90
  text "13" at 13.494,50.927 h1.52 r90
  text "12" at 16.034,50.927 h1.52 r90
  text "~9" at 23.654,50.8 h1.52 r90
  text "~6" at 32.29,50.8 h1.52 r90
  text "~5" at 34.957,50.8 h1.52 r90
  text "~3" at 40.037,50.8 h1.52 r90
  text "~11" at 18.574,50.165 h1.52 r90
  text "~10" at 21.114,50.038 h1.52 r90
  text "SCL" at 3.207,49.53 h1.52 r90
  text "SDA" at 5.874,49.403 h1.52 r90
  text "GND" at 10.954,49.403 h1.52 r90
  text "AREF" at 8.414,48.641 h1.52 r90
  text "DTR" at 4.604,32.893 h1.52
  text "RX" at 4.604,30.353 h1.52
  text "TX" at 4.477,27.686 h1.52
  text "5V" at 4.604,25.146 h1.52
  text "CTS" at 4.477,22.606 h1.52
  text "A7" at 30.766,20.955 h1.52
  text "A6" at 33.306,20.955 h1.52
  text "A5" at 35.719,20.955 h1.52
  text "A4" at 38.259,20.955 h1.52
  text "A3" at 41.053,20.955 h1.52
  text "A2" at 43.593,20.955 h1.52
  text "A1" at 46.26,20.955 h1.52
  text "A0" at 48.546,20.955 h1.52
  text "GND" at 4.477,20.066 h1.52
  text "GND" at 63.786,19.812 h1.52 r90
  text "VCC" at 21.622,17.399 h1.52
  text "MISO" at 11.97,17.272 h1.52
  text "MOSI" at 21.749,14.859 h1.52
  text "SCK" at 12.478,14.732 h1.52
  text "VCC" at 63.913,14.097 h1.52 r90
  text "GND" at 21.622,12.192 h1.52
  text "RST" at 12.605,12.065 h1.52
Drill Drawing:
  the board outline again, w0.254